# Altium PCB Alles.PcbDoc (part 1 of 2)
Units mm, origin at the board's own origin, x right, y up, seen from the top; angles counter-clockwise.
Board outline 50 x 25 mm, 4 copper layers (Top Layer, Layer 1, Layer 2, Bottom Layer), stack 1.171 mm thick; 72 components, 42 nets, 250 pads, 140 vias.
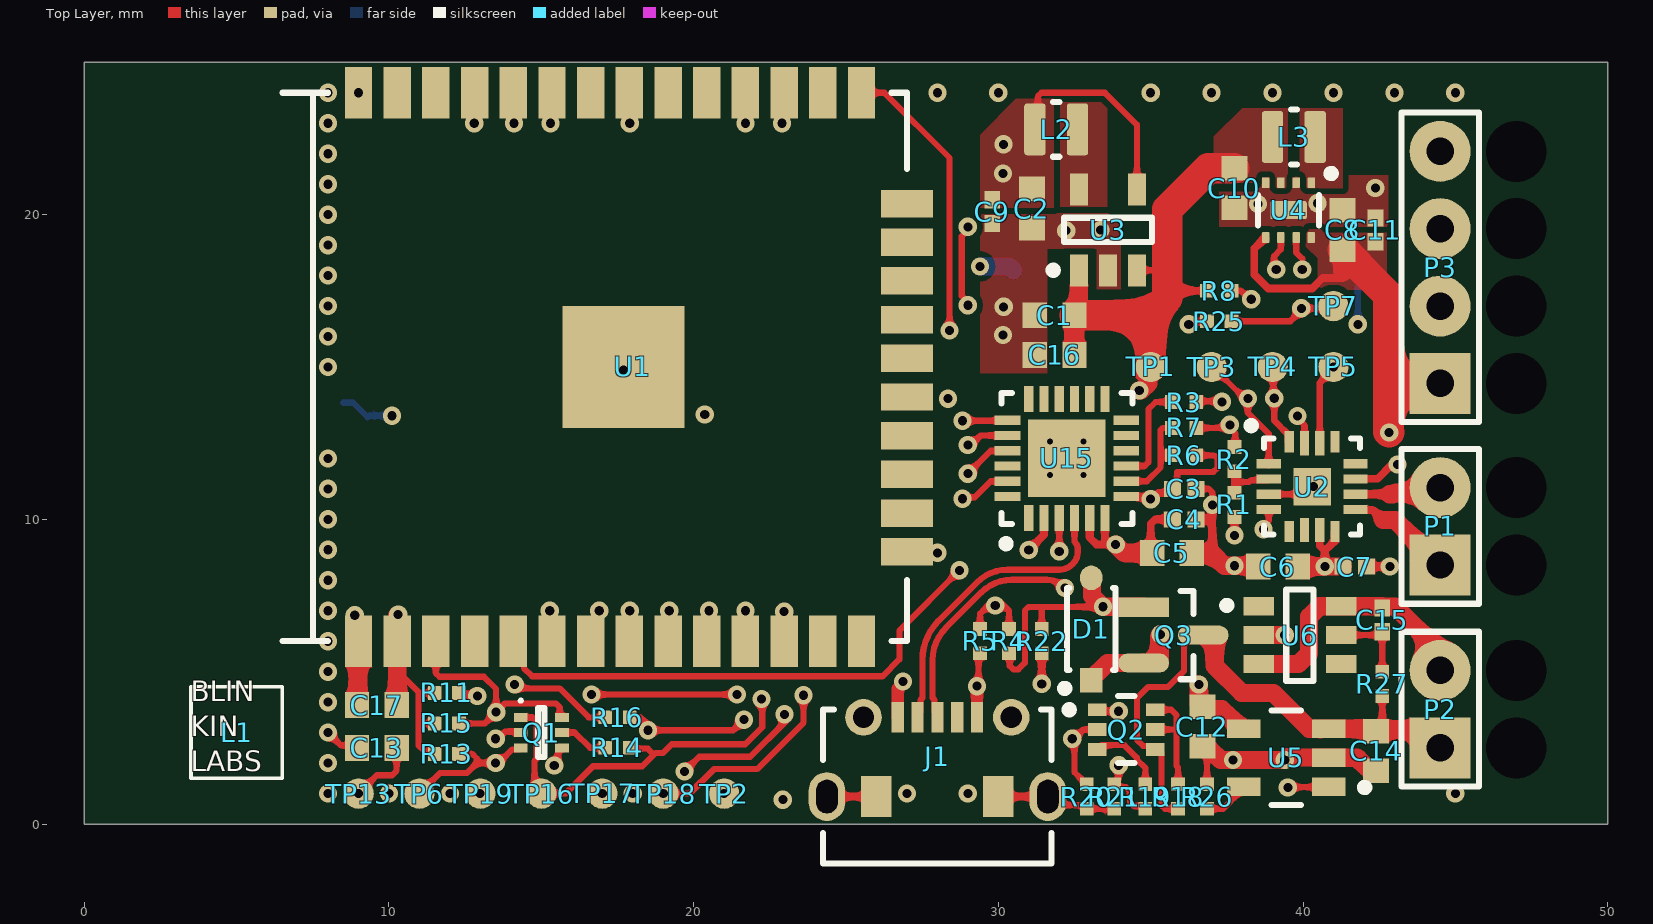
[diagram p0: Top Layer view]
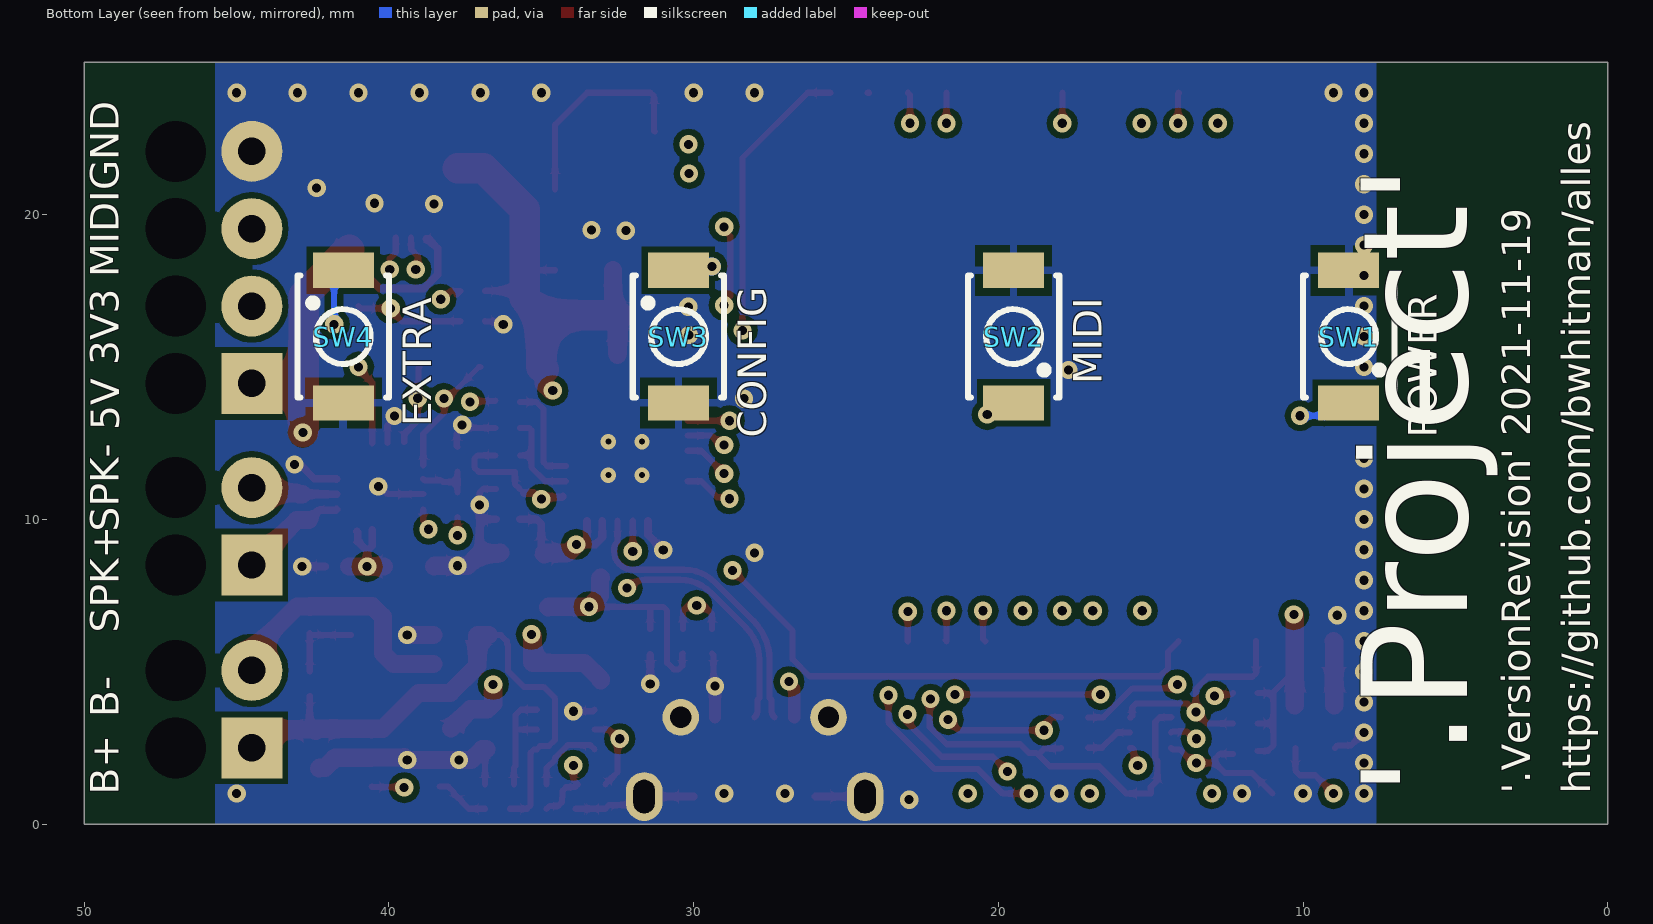
[diagram p1: Bottom Layer view, seen from below]
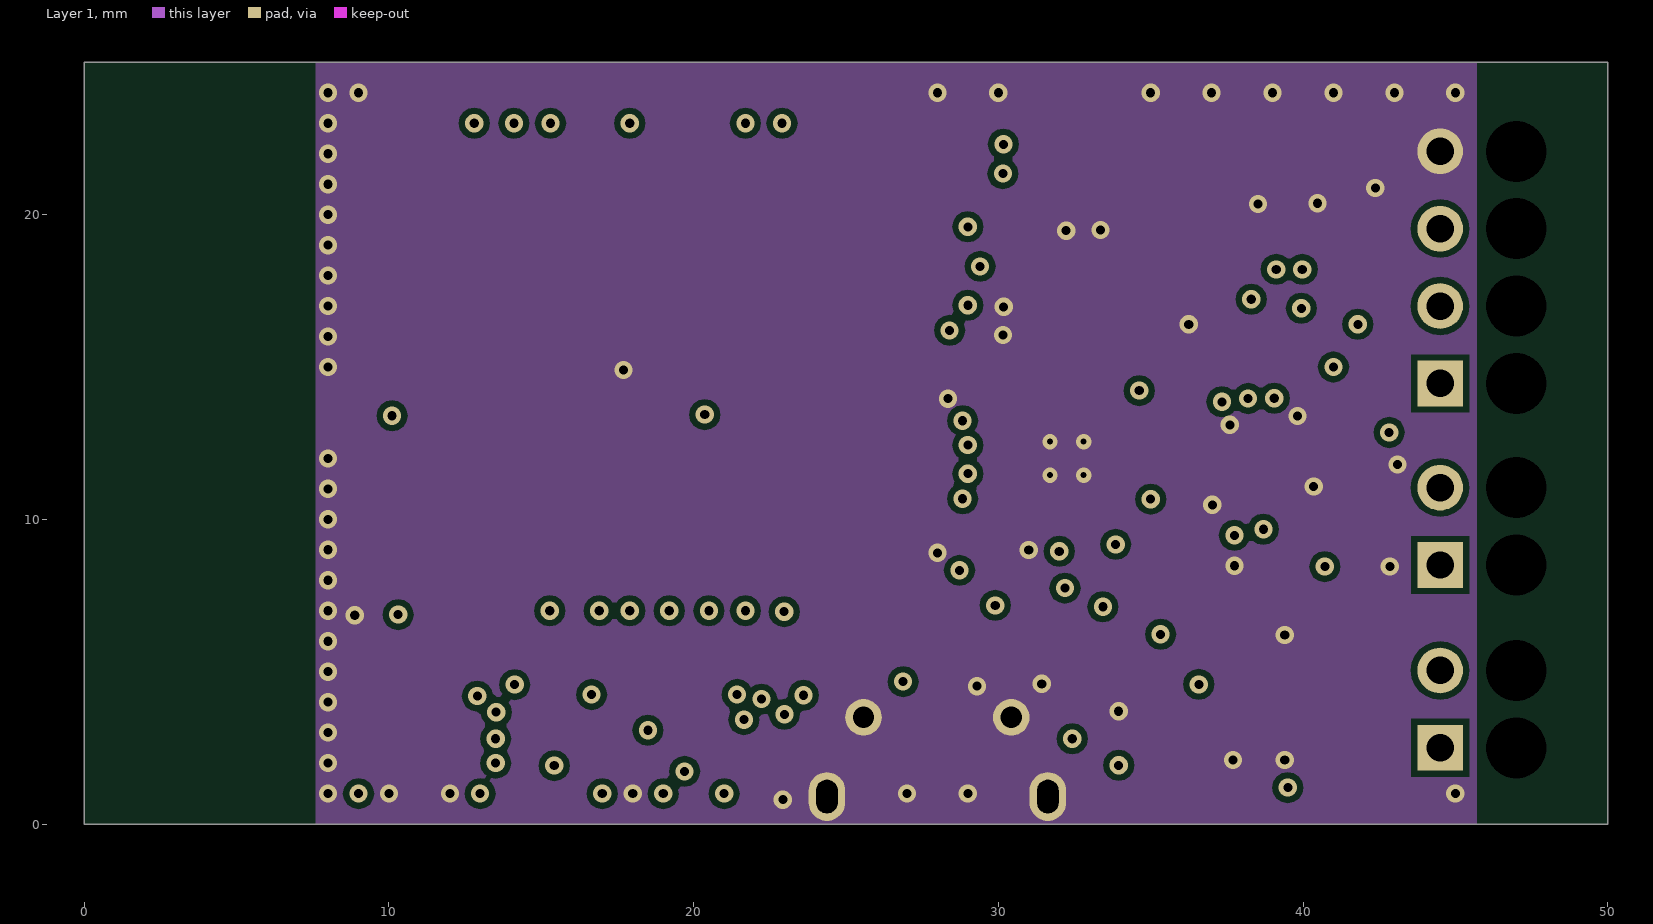
[diagram p2: Layer 1]
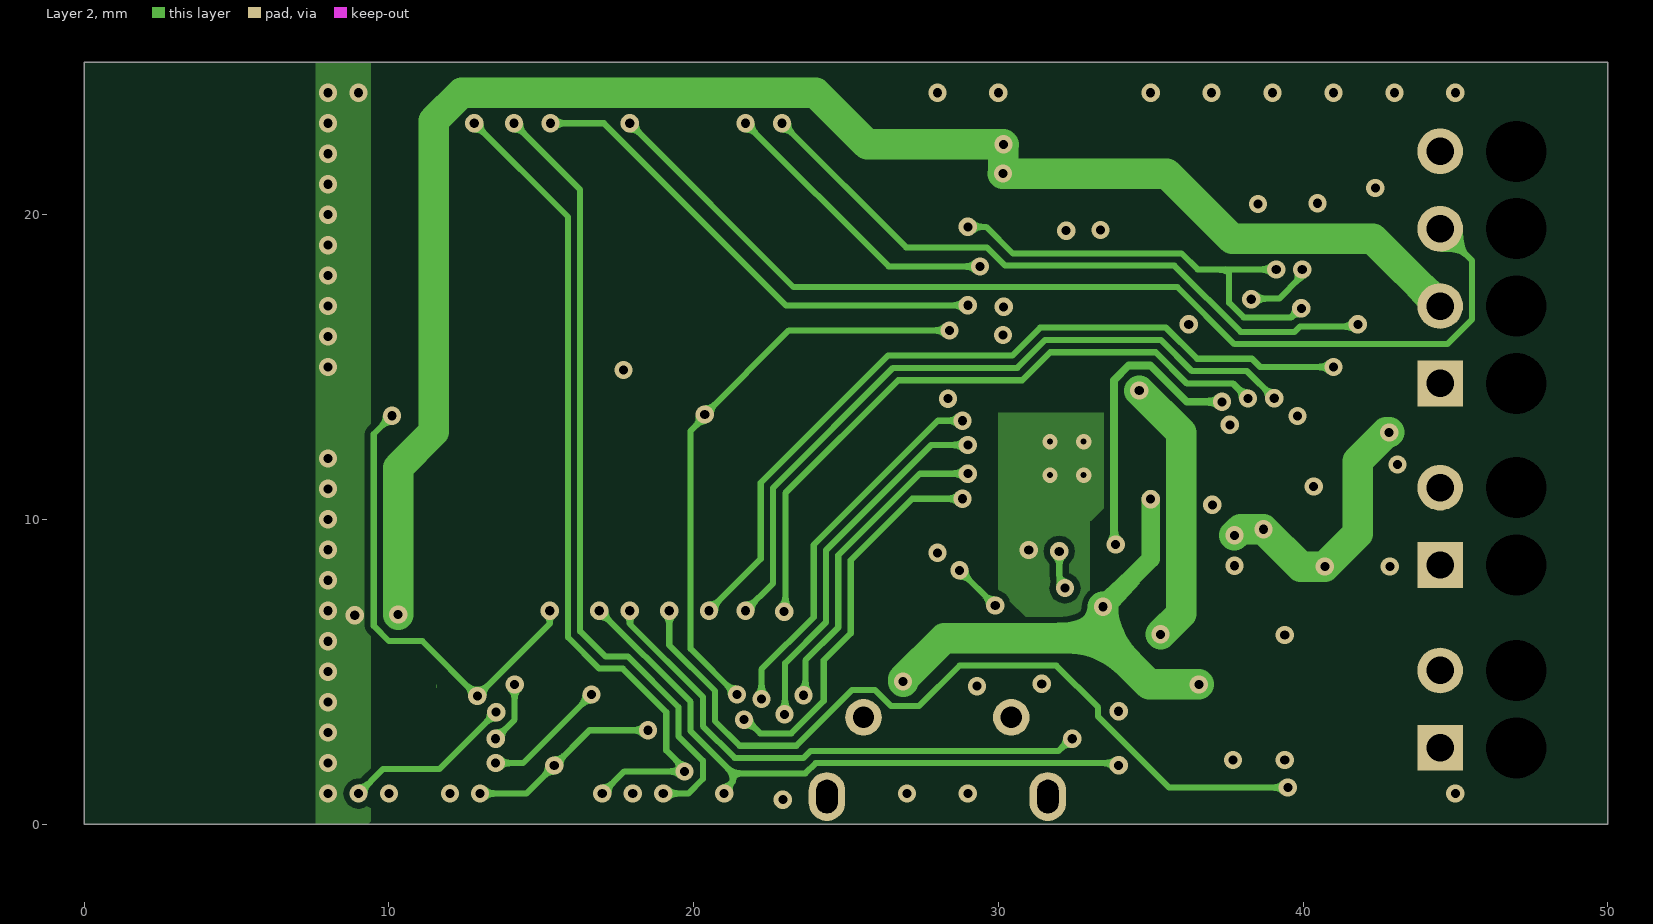
[diagram p3: Layer 2]

## Layer stack, top to bottom
Top Solder: solder mask 0.013, SM-001, Dk 4
Top Layer: signal copper 0.035
Dielectric 2: prepreg 0.2, PP-022, Dk 4.6
Layer 1: signal copper 0.018
Dielectric 3: core 0.665, Core-039, Dk 4.8
Layer 2: signal copper 0.018
Dielectric 4: prepreg 0.2, PP-022, Dk 4.6
Bottom Layer: signal copper 0.035
Bottom Solder: solder mask 0.013, SM-001, Dk 4

## Board outline
0,0 0,25 50,25 50,0

## Design rules (kind name [scope] priority, off if disabled: settings)
Clearance Clearance_diff [InAnyDifferentialPair vs InAnyDifferentialPair] p1: gap=0.127 ignorepadtopadclearanceinfootprint=FALSE
Clearance [All] p2: gap=0.2 ignorepadtopadclearanceinfootprint=TRUE
DiffPairsRouting DiffPairsRouting_90 [InDifferentialPair('USB D')] p1: maxlimit=0.127 minlimit=0.127 mostfreqgap=0.127 toplayer_minwidth=0.205 toplayer_maxwidth=0.205 toplayer_prefwidth=0.205 midlayer1_minwidth=0.133 midlayer1_maxwidth=0.133 midlayer1_prefwidth=0.133 midlayer2_minwidth=0.133 midlayer2_maxwidth=0.133 midlayer2_prefwidth=0.133 bottomlayer_minwidth=0.205 bottomlayer_maxwidth=0.205 bottomlayer_prefwidth=0.205 impedanceprofiledriven=TRUE impedanceprofileid={E291AA02-141E-47CC-AA00-C6A5C8C20C5F} impedanceprofilevalue=90.000000 maxuncoupledlength=12.7
DiffPairsRouting [All] p2: maxlimit=0.254 minlimit=0.254 mostfreqgap=0.254 toplayer_minwidth=0.381 toplayer_maxwidth=0.381 toplayer_prefwidth=0.381 midlayer1_minwidth=0.381 midlayer1_maxwidth=0.381 midlayer1_prefwidth=0.381 midlayer2_minwidth=0.381 midlayer2_maxwidth=0.381 midlayer2_prefwidth=0.381 bottomlayer_minwidth=0.381 bottomlayer_maxwidth=0.381 bottomlayer_prefwidth=0.381 maxuncoupledlength=12.7
PolygonConnect PolygonConnect_power [InNetClass('POWER') and not OnBottomLayer] p1: connectstyle=Direct reliefconductorwidth=0.254 reliefentries=4 polygonreliefangle="90 Angle" airgapwidth=0.254
PolygonConnect [All] p2: connectstyle=Relief reliefconductorwidth=0.254 reliefentries=4 polygonreliefangle="90 Angle" airgapwidth=0.254
RoutingVias [All] p1: holewidth=0.711 width=1.27 viastyle="Through Hole" minholewidth=0.3 minwidth=0.6 maxholewidth=0.711 maxwidth=1.27
SolderMaskExpansion SolderMaskExpansion_via [isvia] p1: expansion=-99 istentingtop=FALSE
SolderMaskExpansion [All] p2: expansion=0.102 istentingtop=FALSE
Width Width_power [InNetClass('POWER')] p1: maxlimit=1 minlimit=0.2 preferedwidth=0.6
Width [All] p2: maxlimit=0.6 minlimit=0.2 preferedwidth=0.254
29 further rules are at their usual default settings.

## Classes and differential pairs
net class USB: "USB D_N" "USB D_P"
net class SERIAL: D\T\R\ R\T\S\ UART0_RXD UART0_TXD
net class POWER: 3.3V 5V 5V_USB GND NetC15_1 NetL2_1 NetL3_2 V_BAT V_SWITCH
component class Alles_base_project: L1
component class "[06] Power Supply": C1 C2 C8 C9 C10 C11 C12 C14 C15 C16 D1 L2 L3 P2 Q2 Q3 R4 R5 R8 R9 R10 R17 R18 R19 R20 R21 R22 R25 R26 R27 TP1 TP2 TP7 TP8 TP12 U3 U4 U5 U6
component class "[05] Amplifier": C6 C7 P1 R1 R2 R17 U2
component class "[04] Serial Console": C3 C4 C5 J1 R3 R6 R7 R12 U15
component class "[03] ESP32": C13 C17 P3 Q1 R11 R12 R13 R14 R15 R16 R17 SW1 SW2 SW3 SW4 TP3 TP4 TP5 TP6 TP8 TP9 TP10 TP11 TP12 TP13 TP16 TP17 TP18 TP19 U1
differential pair "USB D": +"USB D_P" -"USB D_N"

## Components (designator, comment, footprint, x,y, rotation, side; value= is the part's Value field where it differs from the comment)
C1 "4.7uF" CAPC1608X09L 31.85,16.7 r180 top
C2 "10uF" CAPC1608X09L 31.1,20.2 r270 top
C3 "0.10uF" CAPC1005X06L 36.1,11 r180 top
C4 "0.10uF" CAPC1005X06L 36.1,10 r180 top
C5 "4.7uF" CAPC1608X09L 35.7,8.9 r0 top
C6 "10uF" CAPC1608X09L 39.175,8.45 r180 top
C7 "0.10uF" CAPC1005X06L 41.7,8.45 r180 top
C8 "22uF" CAPC1608X09L 41.3,19.5 r90 top
C9 "0.10uF" CAPC1005X06L 29.8,20.1 r90 top
C10 "4.7uF" CAPC1608X09L 37.75,20.875 r270 top
C11 "0.10uF" CAPC1005X06L 42.375,19.5 r270 top
C12 "4.7uF" CAPC1608X09L 36.7,3.2 r270 top
C13 "4.7uF" CAPC1608X09L 9.6,2.5 r180 top
C14 "4.7uF" CAPC1608X09L 42.4,2.4 r270 top
C15 "0.10uF" CAPC1005X06L 42.6,6.7 r270 top
C16 "22uF" CAPC1608X09L 31.85,15.4 r180 top
C17 "22uF" CAPC1608X09L 9.6,3.9 r180 top
D1 "MBR0520LT1G" FP-425-04-IPC_C 33.05,6.4 r90 top
J1 "A01SB741B1-267" A01SB741B1-267 28,3.5 r180 top locked
L1 "BLINKINLABS_LOGO" BLINKINLABS_LOGO_SMALL 5,3 r0 top
L2 "1uH" FNR201610S 31.9,22.8 r180 top
L3 "1uH" FNR201610S 39.7,22.55 r0 top
P1 "Header 2" HDR1X2 44.5,8.5 r90 top
P2 "Battery" HDR1X2 44.5,2.5 r90 top
P3 "Header 4" HDR1X4 44.5,14.46 r90 top
Q1 "EMX1DXV6T1G" ONSC-SOT-563-6-463A-01_V 15,3 r0 top
Q2 "DMC3400SDW-7" FP-SOT363-MFG 34.2,3.1 r0 top
Q3 "DMP3099L-13" FP-SOT23-IPC_A 35.75,6.2 r0 top
R1 "100k" ERJ2G(0402)_L 37.75,10.475 r270 top
R2 "0.0" ERJ2G(0402)_L 37.75,11.975 r270 top
R3 "10k" ERJ2G(0402)_L 36.1,13.85 r0 top
R4 "100k" ERJ2G(0402)_L 30.35,6 r270 top
R5 "10k" ERJ2G(0402)_L 29.4,6 r270 top
R6 "22.1k" ERJ2G(0402)_L 36.1,12.1 r0 top
R7 "47.5k" ERJ2G(0402)_L 36.1,13 r180 top
R8 "1M" ERJ2G(0402)_L 37.25,17.5 r180 top
R11 "10k" ERJ2G(0402)_L 11.9,4.3 r0 top
R13 "10k" ERJ2G(0402)_L 11.9,2.3 r0 top
R14 "100k" ERJ2G(0402)_L 17.5,2.5 r180 top
R15 "10k" ERJ2G(0402)_L 11.9,3.3 r0 top
R16 "100k" ERJ2G(0402)_L 17.5,3.5 r180 top
R18 "100k" ERJ2G(0402)_L 35.9,0.9 r270 top
R19 "100k" ERJ2G(0402)_L 34.825,0.9 r90 top
R20 "100k" ERJ2G(0402)_L 32.9,0.9 r90 top
R21 "10k" ERJ2G(0402)_L 33.8,0.9 r270 top
R22 "10k" ERJ2G(0402)_L 31.425,6 r270 top
R25 "100k" ERJ2G(0402)_L 37.25,16.5 r0 top
R26 "2k" ERJ2G(0402)_L 36.85,0.9 r270 top
R27 "100" ERJ2G(0402)_L 42.6,4.6 r270 top
SW1 "TS-1185" TS-1185 8.5,16 r90 bottom locked
SW2 "TS-1185" TS-1185 19.5,16 r90 bottom locked
SW3 "TS-1185" TS-1185 30.5,16 r270 bottom locked
SW4 "TS-1185" TS-1185 41.5,16 r270 bottom locked
TP1 "TEST_POINT" TP-SMD-1mm 35,15 r90 top
TP2 "TEST_POINT" TP-SMD-1mm 21,1 r90 top
TP3 "TEST_POINT" TP-SMD-1mm 37,15 r90 top
TP4 "TEST_POINT" TP-SMD-1mm 39,15 r90 top
TP5 "TEST_POINT" TP-SMD-1mm 41,15 r90 top
TP6 "TEST_POINT" TP-SMD-1mm 11,1 r90 top
TP7 "TEST_POINT" TP-SMD-1mm 41,17 r90 top
TP13 "TEST_POINT" TP-SMD-1mm 9,1 r90 top
TP16 "TEST_POINT" TP-SMD-1mm 15,1 r90 top
TP17 "TEST_POINT" TP-SMD-1mm 17,1 r90 top
TP18 "TEST_POINT" TP-SMD-1mm 19,1 r90 top
TP19 "TEST_POINT" TP-SMD-1mm 13,1 r90 top
U1 "ESP32-WROOM-32E(4MB)" ESP32-WROOM-32-shortpad 9,6 r90 top locked
U2 "MAX98357AETE+" FP-T1633-4-MFG 40.3,11.075 r0 top
U3 "ADP2108AUJZ-3.3-R7" SOT95P280X100-5N 33.6,19.5 r90 top
U4 "MIC2875-5.0YMT-T5" "TDFN22-8LD-PL-1 (hand drawn)" 39.525,20.15 r270 top
U5 "MCP73832T-2ACI/OT" FP-C04-091-OT-MFG 39.45,2.175 r180 top
U6 "XB5307H" SOT95P280X125-6N-3 39.9,6.2 r0 top
U15 "CP2102N-A01-GQFN24" SLAB-QFN-24-2550x2550TP_A_V 32.25,12 r90 top

## Footprints (in the part's own frame and the unit in brackets; to place one, negate y for a bottom-side part, rotate by r counter-clockwise, add the part's x,y. Pads: shape width x height; smd on the part's side, far side on the other; paste and mask are expansions set on the pad)
A01SB741B1-267 [mm] "micro usb B type"
  rect 0.4x1 smd: D+(0,0) D-(0.65,0) GND(-1.3,0) ID(-0.65,0) VBUS(1.3,0)
  rrect100% 1.2x1.6 hole 0.7 slot 1.1 at 90 deg: S1(-3.625,2.6) S2(3.625,2.6)
  round 1.2 hole 0.7: S3(-2.425,0) S4(2.425,0)
  rect 1x1.35 smd: S5(-2,2.6) S6(2,2.6)
  silkscreen extent -3.75,-0.26 3.75,4.8, body extent -3.75,-0.3 3.75,4.78, height 2.44
BLINKINLABS_LOGO_SMALL [mm] "Small blinkinlabs logo"
  silkscreen extent -1.5,-1.5 1.5,1.5
CAPC1005X06L [mm] "Chip Capacitor, 2-Leads, Body 1.00x0.50mm, IPC High Density"
  rect 0.56x0.52 smd: 1(-0.39,0) 2(0.39,0)
  body extent -0.53,-0.28 0.53,0.28, height 0.55
CAPC1608X09L [mm] "Chip Capacitor, 2-Leads, Body 1.60x0.80mm, IPC High Density"
  rect 0.8x0.85 smd: 1(-0.65,0) 2(0.65,0)
  body extent -0.85,-0.45 0.85,0.45, height 0.9
ERJ2G(0402)_L [mm] "Chip Resistor, 2-Leads, Body 1.00x0.50mm, IPC High Density"
  rect 0.45x0.45 smd: 1(-0.4,0) 2(0.4,0)
  body extent -0.53,-0.27 0.53,0.28, height 0.4
ESP32-WROOM-32-shortpad [mm] "ESP32 module, with shorter solder pads"
  rect 1.7x0.9 smd paste-99: 1(0,0) 2(0,-1.27) 3(0,-2.54) 4(0,-3.81) 5(0,-5.08) 6(0,-6.35) 7(0,-7.62) 8(0,-8.89) 9(0,-10.16) 10(0,-11.43) 11(0,-12.7) 12(0,-13.97) 13(0,-15.24) 14(0,-16.51) 25(18,-16.51) 26(18,-15.24) 27(18,-13.97) 28(18,-12.7) 29(18,-11.43) 30(18,-10.16) 31(18,-8.89) 32(18,-7.62) 33(18,-6.35) 34(18,-5.08) 35(18,-3.81) 36(18,-2.54) 37(18,-1.27) 38(18,0)
  rect 0.9x1.7 smd paste-99: 15(2.935,-18) 16(4.205,-18) 17(5.475,-18) 18(6.745,-18) 19(8.015,-18) 20(9.285,-18) 21(10.555,-18) 22(11.825,-18) 23(13.095,-18) 24(14.365,-18)
  rect 4x4 smd paste-99: 39(9,-8.7)
  silkscreen extent 0,-18 18,2.5, body extent 0,-18 18,7.5, height 2.8
FNR201610S [mm] "Wire Wound SMD Power Inductors 2.0×1.6×1.0"
  rrect25% 0.7x1.7 smd paste+0: 1(-0.7,0) 2(0.7,0)
  silkscreen extent -0.1,-0.9 0.1,0.9, body extent -1,-0.8 1,0.8, height 0.95
FP-425-04-IPC_C [mm]
  rect 0.808x0.742 smd paste+0 mask+0: 1(-1.68,0)
  rrect100% 0.808x0.742 smd paste+0 mask+0: 2(1.68,0)
  silkscreen extent -2.07,-0.8 1.35,1, body extent -2.18,-0.9 2.18,0.9, height 0.25
FP-C04-091-OT-MFG [mm]
  rect 1.1x0.6 smd paste+0 mask+0: 1(-1.4,0.95) 2(-1.4,0) 3(-1.4,-0.95) 4(1.4,-0.95) 5(1.4,0.95)
  silkscreen extent -2.7,-1.55 0.48,1.55, body extent -2.05,-1.9 2.05,1.9, height 0.25
FP-SOT23-IPC_A [mm]
  rect 1.659x0.627 smd paste+0 mask+0: 1(-0.977,0.915)
  rrect100% 1.659x0.627 smd paste+0 mask+0: 2(-0.977,-0.915) 3(0.977,0)
  silkscreen extent 0.23,-1.45 0.65,1.45, body extent -2.31,-1.95 2.31,1.95, height 0.25
FP-SOT363-MFG [mm]
  rect 0.6x0.42 smd paste+0 mask+0: 1(-0.95,0.65) 2(-0.95,0) 3(-0.95,-0.65) 4(0.95,-0.65) 5(0.95,0) 6(0.95,0.65)
  silkscreen extent -2,-1.1 0.28,1.1, body extent -1.35,-1.2 1.35,1.2, height 0.25
FP-T1633-4-MFG [mm]
  rect 0.8x0.3 smd paste+0 mask+0: 1(-1.425,0.75) 2(-1.425,0.25) 3(-1.425,-0.25) 4(-1.425,-0.75) 9(1.425,-0.75) 10(1.425,-0.25) 11(1.425,0.25) 12(1.425,0.75)
  rect 0.3x0.7 smd paste+0 mask+0: 5(-0.75,-1.475) 8(0.75,-1.475) 13(0.75,1.475) 16(-0.75,1.475)
  rect 0.3x0.8 smd paste+0 mask+0: 6(-0.25,-1.425) 7(0.25,-1.425) 14(0.25,1.425) 15(-0.25,1.425)
  rect 1.23x1.23 smd paste+0 mask+0: 17(0,0)
  silkscreen extent -2.12,-1.58 1.58,2.12, body extent -1.92,-1.92 1.92,1.92, height 0.25
HDR1X2 [mm] "Connector; Header; 2 Position"
  rect 2x2 / inner rect 1.5x1.5 / far side rect 2x2 hole 0.9: 1(0,0)
  round 2 / inner round 1.5 / far side round 2 hole 0.9: 2(2.54,0)
  silkscreen extent -1.27,-1.27 3.81,1.27
HDR1X4 [mm] "Connector; Header; 4 Position"
  rect 2x2 / inner rect 1.5x1.5 / far side rect 2x2 hole 0.9: 1(0,0)
  round 2 / inner round 1.5 / far side round 2 hole 0.9: 2(2.54,0) 3(5.08,0) 4(7.62,0)
  silkscreen extent -1.27,-1.27 8.89,1.27
ONSC-SOT-563-6-463A-01_V [mm] "SOT23, 6-Leads, Body 1.6x1.2mm, Pitch 0.5mm"
  rect 0.45x0.3 smd: 1(-0.675,0.5) 2(-0.675,0) 3(-0.675,-0.5) 4(0.675,-0.5) 5(0.675,0) 6(0.675,0.5)
  silkscreen extent -0.72,-0.8 0.1,1.1, body extent -0.6,-0.8 0.6,0.8, height 0.6
SLAB-QFN-24-2550x2550TP_A_V [mm] "QFN, 6-Leads, Body 4x4mm, Pitch 0.5mm, Thermal Pad 2.55x2.55mm"
  rect 0.85x0.3 smd: 1(-1.95,1.25) 2(-1.95,0.75) 3(-1.95,0.25) 4(-1.95,-0.25) 5(-1.95,-0.75) 6(-1.95,-1.25) 13(1.95,-1.25) 14(1.95,-0.75) 15(1.95,-0.25) 16(1.95,0.25) 17(1.95,0.75) 18(1.95,1.25)
  rect 0.3x0.85 smd: 7(-1.25,-1.95) 8(-0.75,-1.95) 9(-0.25,-1.95) 10(0.25,-1.95) 11(0.75,-1.95) 12(1.25,-1.95) 19(1.25,1.95) 20(0.75,1.95) 21(0.25,1.95) 22(-0.25,1.95) 23(-0.75,1.95) 24(-1.25,1.95)
  rect 2.55x2.55 smd: 25(0,0)
  silkscreen extent -2.92,-2.15 2.15,2.15, body extent -2,-2 2,2, height 0.8
SOT95P280X100-5N [mm] "SOT23, 5-Leads, Body 2.90x2.80mm, Pitch 0.95mm, IPC Medium Density"
  rect 1.05x0.6 smd: 1(-1.325,0.95) 2(-1.325,0) 3(-1.325,-0.95) 4(1.325,-0.95) 5(1.325,0.95)
  silkscreen extent -1.45,-1.45 0.4,1.92, body extent -1.4,-1.45 1.4,1.45, height 1
SOT95P280X125-6N-3 [mm] "SOT23, 6-Leads, Body 2.92x2.80mm, Pitch 0.95mm, IPC Medium Density"
  rect 1x0.6 smd: 1(-1.35,0.95) 2(-1.35,0) 3(-1.35,-0.95) 4(1.35,-0.95) 5(1.35,0) 6(1.35,0.95)
  silkscreen extent -2.52,-1.5 0.45,1.5, body extent -1.48,-1.51 1.48,1.51, height 1.25
"TDFN22-8LD-PL-1 (hand drawn)" [mm]
  rrect25% 0.35x0.25 smd: 1(-0.9,0.75) 2(-0.9,0.25) 3(-0.9,-0.25) 4(-0.9,-0.75) 5(0.9,-0.75) 6(0.9,-0.25) 7(0.9,0.25) 8(0.9,0.75)
  rrect25% 0.6x1.2 smd: 9(0,0)
  silkscreen extent -1.32,-1 0.5,1.53, body extent -1,-1 1,1, height 0.55
TP-SMD-1mm [mm] "Test point, round, 1mm, SMD"
  round 1 smd paste-999: 1(0,0)
TS-1185 [mm] "3x4x2mm Tact Switch, no alignment pin"
  rect 1.15x2 smd: 1(-2.175,0) 2(2.175,0)
  silkscreen extent -2,-1.5 2,1.5, body extent -2,-1.5 2,1.5, height 2

## Part data
C1 C10 C12 C14: library part GRM188R61A475KE15D, "CAP CER 4.7UF 10V X5R 0603", Case/Package=0603, Digi-Key Part Number=490-10477-1-ND, Manufacturer="Murata Electronics North America", Operating Temperature="-55°C ~ 85°C", Package / Case="0603 (1608 Metric)", Temperature Coefficient=X5R, Tolerance=±10%, Voltage=10V, Applications="General Purpose", Datasheets=http://www.murata.com/~/media/webrenewal/support/library/catalog/products/capacitor/mlcc/c02e.pdf, Features="Derating Recommended", Image=//media.digikey.com/Renders/Murata%20Renders/ZRB-SERIES-0402.jpg, PartNumber=GRM188R61A475KE15D, Series=GRM
C2 C6: library part GRM188R61A106KE69D, "CAP CER 10UF 10V X5R 0603", Case/Package=0603, Digi-Key Part Number=490-10474-1-ND, Manufacturer="Murata Electronics North America", Operating Temperature="-55°C ~ 85°C", Package / Case="0603 (1608 Metric)", Temperature Coefficient=X5R, Tolerance=±10%, Voltage=10V, Applications="General Purpose", Datasheets=http://www.murata.com/~/media/webrenewal/support/library/catalog/products/capacitor/mlcc/c02e.pdf, Features="Derating Recommended", Image=//media.digikey.com/Renders/Murata%20Renders/ZRB-SERIES-0402.jpg, PartNumber=GRM188R61A106KE69D, Series=GRM
C3 C4 C7: library part GRM152R61A104ME19D, "CAP CER 0.1UF 10V X5R 0402", Case/Package=0402, Digi-Key Part Number=490-10009-1-ND, Manufacturer="Murata Electronics North America", Operating Temperature="-55°C ~ 85°C", Package / Case="0402 (1005 Metric)", Temperature Coefficient=X5R, Tolerance=±20%, Voltage=10V, Applications="General Purpose", Datasheets=http://www.murata.com/~/media/webrenewal/support/library/catalog/products/capacitor/mlcc/c02e.pdf, Features="Derating Recommended", Image=//media.digikey.com/Renders/Murata%20Renders/ZRB-SERIES-0402.jpg, Packaging="Cut Tape (CT)", PartNumber=GRM152R61A104ME19D, Series=GRM
C5 C13: library part GRM185R61A475KE11D, "CAP CER 4.7UF 10V X5R 0603", Case/Package=0603, Digi-Key Part Number=490-11988-1-ND, Manufacturer="Murata Electronics North America", Operating Temperature="-55°C ~ 85°C", Package / Case="0603 (1608 Metric)", Temperature Coefficient=X5R, Tolerance=±10%, Voltage=10V, Applications="General Purpose", Datasheets=http://www.murata.com/~/media/webrenewal/support/library/catalog/products/capacitor/mlcc/c02e.pdf, Features=-, Image=//media.digikey.com/Renders/Murata%20Renders/ZRB-SERIES-0402.jpg, PartNumber=GRM185R61A475KE11D, Series=GRM
C8 C16 C17: library part GRM187R61A226ME15D, "CAP CER 22UF 10V X5R 0603", Case/Package=0603, Digi-Key Part Number=490-13243-1-ND, Manufacturer="Murata Electronics North America", Operating Temperature="-55°C ~ 85°C", Package / Case="0603 (1608 Metric)", Temperature Coefficient=X5R, Tolerance=±20%, Voltage=10V, Applications="General Purpose", Datasheets=http://psearch.en.murata.com/capacitor/product/GRM187R61A226ME15%23.pdf, Features="Derating Recommended", Image=//media.digikey.com/Renders/Murata%20Renders/ZRB-SERIES-0402.jpg, PartNumber=GRM187R61A226ME15D, Series=GRM
C9 C11 C15: library part GRM155R61C104KA88J, "CAP CER 0.1UF 16V X5R 0402", Case/Package=0402, Digi-Key Part Number=490-6310-1-ND, Manufacturer="Murata Electronics North America", Operating Temperature="-55°C ~ 85°C", Package / Case="0402 (1005 Metric)", Temperature Coefficient=X5R, Tolerance=±10%, Voltage=16V, Applications="General Purpose", Datasheets=http://www.murata.com/~/media/webrenewal/support/library/catalog/products/capacitor/mlcc/c02e.pdf, Features=-, Image=//media.digikey.com/Renders/Murata%20Renders/ZRB-SERIES-0402.jpg, Packaging="Cut Tape (CT)", PartNumber=GRM155R61C104KA88J, Series=GRM
D1: library part CMP-1055-00425-2, "DIODE SCHOTTKY 20V 500MA SOD123", Average Rectified Current=500mA, Case/Package=SOD-123-2, Forward Voltage=385mV, Max Forward Surge Current (Ifsm)=5.5A, Max Operating Temperature=125°C, Max Repetitive Reverse Voltage (Vrrm)=20V, Max Reverse Leakage Current=250uA, Min Operating Temperature=-65°C, Package Quantity=3000, Contact Plating=Tin, Current Rating=500mA, Element Configuration=Single, Forward Current=500mA, Height=1.12mm, Lead Free="Lead Free", Length=2.69mm, Max Reverse Voltage (DC)=20V, Max Surge Current=5.5A, Number of Pins=2, Output Current=500mA, Packaging="Tape and Reel", Peak Non-Repetitive Surge Current=5.5A, Peak Reverse Current=250uA, Polarity=Standard, Radiation Hardening=No, REACH SVHC="No SVHC", Termination=SMD/SMT, Voltage Rating (DC)=20V, Width=1.6mm
J1: "Micro USB B type 四脚全插牛角", Manufacturer=Unknown/Generic, PartNumber=Unknown/Generic
L1: "Square logo"
L2 L3: library part FNR201610S1R0MT, "1uH ±20% 1.45A 114mΩ SMD,2.0x1.6x1.0mm Power Inductors RoHS", Case/Package=SMD,2.0x1.6x1.0mm, DC Resistance=114mΩ, LCSC PartNumber=C167670, Manufacturer="Changjiang Microelectronics Tech", Saturation current=1.45A, Tolerance=±20%, Datasheets=https://datasheet.lcsc.com/szlcsc/1805291223_cjiang-Changjiang-Microelectronics-Tech-FNR201610S1R0MT_C167670.pdf, Inductance=1uH, Package / Case=SMD,2.0x1.6x1.0mm, Packaging="Cut Tape (CT)", PartNumber=FNR201610S1R0MT
P1: "Header, 2-Pin", LatestRevisionDate=17-Jul-2002, LatestRevisionNote="Re-released for DXP Platform.", Publisher="Altium Limited"
P2: library part "Header 2", "Header, 2-Pin", LatestRevisionDate=17-Jul-2002, LatestRevisionNote="Re-released for DXP Platform.", Publisher="Altium Limited"
P3: "Header, 4-Pin", LatestRevisionDate=17-Jul-2002, LatestRevisionNote="Re-released for DXP Platform.", Publisher="Altium Limited"
Q1: library part CMP-1048-00890-1, "Dual NPN General Purpose Amplifier Transistors, 6-Pin SOT-563, Pb-Free, Tape and Reel", Manufacturer="On Semiconductor", ComponentLink1Description="Manufacturer URL", ComponentLink1URL=http://www.onsemi.com/, ComponentLink2Description=Datasheet, ComponentLink2URL=http://www.onsemi.com/pub_link/Collateral/EMX1DXV6T1-D.PDF, ComponentLink3Description="Package Specification", ComponentLink3URL=http://www.onsemi.cn/pub_link/Collateral/463A-01.PDF, DatasheetVersion="Rev. 1", IC Continuous (A)=0.1, Mounting Technology="Surface Mount", PackageDescription="6-Pin Small Outline Transistor, Body 1.6 x 1.2 mm, Pitch 0.5 mm", PackageReference=SOT-563-6-463A-01, PackageVersion="Rev. F, 04/2005", Packing="Tape and Reel", PartNumber=EMX1DXV6T1G, Polarity="Dual NPN", RoHS=TRUE
Q2: library part CMP-12801-000006-1, "MOSFET N/P-CH 30V SOT363", Continuous Drain Current=0.65/-0.45A, Drain To Source Breakdown Voltage=30/-30V, Drain To Source Resistance=0.2/0.36Ω, Gate To Source Voltage=20V, Manufacturer="Diodes Inc.", Max Forward Diode Voltage=1.2/-1.2V, Max Junction Temp=+150°C, Package=SOT363, Power Dissipation=0.31W, Pulse Drain Current=4/-3A, Temperature="-55°C to +150°C", Temperature Range Low=-55°C, Typ Forward Diode Voltage=0.8/-0.8V, Automotive=No, Category=Trans, ComponentLink2Description=Datasheet, ComponentLink2URL=https://www.diodes.com/assets/Datasheets/DMC3400SDW.pdf, Depletion Mode=False, Device Class L1="Discrete Semiconductors", Device Class L2=Transistors, Device Class L3=MOSFETs, Digikey Description="MOSFET N/P-CH 30V SOT363", Drain To Source Voltage=30/-30V, Footprint Url=https://www.diodes.com/assets/Package-Files/SOT363.pdf, Height=1.1mm, Ipc Land Pattern Name=SOT65P210X100-6, Lead Free=Yes, Manufacturer Part Number=DMC3400SDW-7, Mouser Description="MOSFET 30V Comp Pair Enh 20Vgs 55pF 0.6nC", Number of Channels=2, Number Of N Channels=1, Number Of P Channels=1, Octopart=https://octopart.com/dmc3400sdw-7-diodes+inc.-57605013, RoHS=TRUE, Rthja Max=406°C/W, Standoff Height=0mm, Temperature Range High=+150°C, Threshold Vgs Max=1.6/-2.6V, Threshold Vgs Min=0.8/-1V, Turn Off Delay Time=25.2/35ns, Turn On Delay Time=3.8/5.7ns
Q3: library part CMP-12801-000102-1, "MOSFET P-CH 30V 3.8A SOT23", Case/Package=TO-236-3, Continuous Drain Current (ID)=3.8A, Drain To Source Resistance=65mR, Drain to Source Voltage (Vdss)=30V, Gate to Source Voltage (Vgs)=20V, Input Capacitance=563pF, Max Operating Temperature=150°C, Max Power Dissipation=1.08W, Min Operating Temperature=-55°C, Package Quantity=10000, Element Configuration=Single, Fall Time=15ns, Lead Free="Lead Free", Mount="Surface Mount", Number of Channels=1, Number of Pins=3, Packaging="Tape and Reel", Radiation Hardening=No, Rds On Max=65mR, REACH SVHC="No SVHC", Rise Time=5ns, Turn-Off Delay Time=31ns, Turn-On Delay Time=4.8ns, Weight=0.000282oz
R1 R4 R14 R16 R18 R19 R20 R25: library part ERJ-2GEJ104X, "RES SMD 100K OHM 5% 1/10W 0402", Case/Package=0402, Digi-Key Part Number=P100KJCT-ND, Manufacturer="Panasonic Electronic Components", Operating Temperature="-55°C ~ 155°C", Package / Case="0402 (1005 Metric)", Power (Watts)="0.1W, 1/10W", Temperature Coefficient=±200ppm/°C, Tolerance=±5%, Composition="Thick Film", Datasheets=http://industrial.panasonic.com/www-cgi/jvcr13pz.cgi?E+PZ+3+AOA0001+ERJ2GEJ104X+7+WW, Features="Automotive AEC-Q200", Height - Seated (Max)="0.016\" (0.40mm)", Image=//media.digikey.com/Photos/Panasonic%20Photos/ERJ-PA2-Series.jpg, Number of Terminations=2, PartNumber=ERJ-2GEJ104X, Series=ERJ, Size / Dimension="0.039\" L x 0.020\" W (1.00mm x 0.50mm)"
R2: library part ERJ-2GE0R00X, "RES SMD 0.0OHM JUMPER 1/10W 0402", Case/Package=0402, Digi-Key Part Number=P0.0JCT-ND, Manufacturer="Panasonic Electronic Components", Operating Temperature="-55°C ~ 155°C", Package / Case="0402 (1005 Metric)", Power (Watts)="0.1W, 1/10W", Temperature Coefficient=-, Tolerance=Jumper, Composition="Thick Film", Datasheets=http://industrial.panasonic.com/www-cgi/jvcr13pz.cgi?E+PZ+3+AOA0001+ERJ2GE0R00X+7+WW, Features="Automotive AEC-Q200", Height - Seated (Max)="0.016\" (0.40mm)", Image=//media.digikey.com/Photos/Panasonic%20Photos/ERJ-PA2-Series.jpg, Number of Terminations=2, PartNumber=ERJ-2GE0R00X, Series=ERJ, Size / Dimension="0.039\" L x 0.020\" W (1.00mm x 0.50mm)"
R3 R5 R11 R13 R15 R21 R22: library part ERJ-2GEJ103X, "RES SMD 10K OHM 5% 1/10W 0402", Case/Package=0402, Digi-Key Part Number=P10KJCT-ND, Manufacturer="Panasonic Electronic Components", Operating Temperature="-55°C ~ 155°C", Package / Case="0402 (1005 Metric)", Power (Watts)="0.1W, 1/10W", Temperature Coefficient=±200ppm/°C, Tolerance=±5%, Composition="Thick Film", Datasheets=http://industrial.panasonic.com/www-cgi/jvcr13pz.cgi?E+PZ+3+AOA0001+ERJ2GEJ103X+7+WW, Features="Automotive AEC-Q200", Height - Seated (Max)="0.016\" (0.40mm)", Image=//media.digikey.com/Photos/Panasonic%20Photos/ERJ-PA2-Series.jpg, Number of Terminations=2, PartNumber=ERJ-2GEJ103X, Series=ERJ, Size / Dimension="0.039\" L x 0.020\" W (1.00mm x 0.50mm)"
R6: library part ERJ-2RKF2212X, "RES SMD 22.1K OHM 1% 1/10W 0402", Case/Package=0402, Digi-Key Part Number=P22.1KLCT-ND, Manufacturer="Panasonic Electronic Components", Operating Temperature="-55°C ~ 155°C", Package / Case="0402 (1005 Metric)", Power (Watts)="0.1W, 1/10W", Temperature Coefficient=±100ppm/°C, Tolerance=±1%, Composition="Thick Film", Datasheets=http://industrial.panasonic.com/www-cgi/jvcr13pz.cgi?E+PZ+3+AOA0002+ERJ2RKF2212X+7+WW, Features="Automotive AEC-Q200", Height - Seated (Max)="0.016\" (0.40mm)", Image=//media.digikey.com/Photos/Panasonic%20Photos/ERJ-PA2-Series.jpg, Number of Terminations=2, PartNumber=ERJ-2RKF2212X, Series=ERJ, Size / Dimension="0.039\" L x 0.020\" W (1.00mm x 0.50mm)"
R7: library part ERJ-2RKF4752X, "RES SMD 47.5K OHM 1% 1/10W 0402", Case/Package=0402, Digi-Key Part Number=P47.5KLCT-ND, Manufacturer="Panasonic Electronic Components", Operating Temperature="-55°C ~ 155°C", Package / Case="0402 (1005 Metric)", Power (Watts)="0.1W, 1/10W", Temperature Coefficient=±100ppm/°C, Tolerance=±1%, Composition="Thick Film", Datasheets=http://industrial.panasonic.com/www-cgi/jvcr13pz.cgi?E+PZ+3+AOA0002+ERJ2RKF4752X+7+WW, Features="Automotive AEC-Q200", Height - Seated (Max)="0.016\" (0.40mm)", Image=//media.digikey.com/Photos/Panasonic%20Photos/ERJ-PA2-Series.jpg, Number of Terminations=2, PartNumber=ERJ-2RKF4752X, Series=ERJ, Size / Dimension="0.039\" L x 0.020\" W (1.00mm x 0.50mm)"
R8: library part ERJ-2GEJ105X, "RES SMD 1M OHM 5% 1/10W 0402", Case/Package=0402, Digi-Key Part Number=P1.0MJCT-ND, Manufacturer="Panasonic Electronic Components", Operating Temperature="-55°C ~ 155°C", Package / Case="0402 (1005 Metric)", Power (Watts)="0.1W, 1/10W", Temperature Coefficient=±200ppm/°C, Tolerance=±5%, Composition="Thick Film", Datasheets=http://industrial.panasonic.com/www-cgi/jvcr13pz.cgi?E+PZ+3+AOA0001+ERJ2GEJ105X+7+WW, Features="Automotive AEC-Q200", Height - Seated (Max)="0.016\" (0.40mm)", Image=//media.digikey.com/Photos/Panasonic%20Photos/ERJ-PA2-Series.jpg, Number of Terminations=2, PartNumber=ERJ-2GEJ105X, Series=ERJ, Size / Dimension="0.039\" L x 0.020\" W (1.00mm x 0.50mm)"
R26: library part ERJ-2GEJ202X, "RES SMD 2K OHM 5% 1/10W 0402", Case/Package=0402, Digi-Key Part Number=P2.0KJCT-ND, Manufacturer="Panasonic Electronic Components", Operating Temperature="-55°C ~ 155°C", Package / Case="0402 (1005 Metric)", Power (Watts)="0.1W, 1/10W", Temperature Coefficient=±200ppm/°C, Tolerance=±5%, Composition="Thick Film", Datasheets=http://industrial.panasonic.com/www-cgi/jvcr13pz.cgi?E+PZ+3+AOA0001+ERJ2GEJ202X+7+WW, Features="Automotive AEC-Q200", Height - Seated (Max)="0.016\" (0.40mm)", Image=//media.digikey.com/Photos/Panasonic%20Photos/ERJ-PA2-Series.jpg, Number of Terminations=2, PartNumber=ERJ-2GEJ202X, Series=ERJ, Size / Dimension="0.039\" L x 0.020\" W (1.00mm x 0.50mm)"
R27: library part ERJ-2RKF1000X, "RES SMD 100 OHM 1% 1/10W 0402", Case/Package=0402, Digi-Key Part Number=P100LCT-ND, Manufacturer="Panasonic Electronic Components", Operating Temperature="-55°C ~ 155°C", Package / Case="0402 (1005 Metric)", Power (Watts)="0.1W, 1/10W", Temperature Coefficient=±100ppm/°C, Tolerance=±1%, Composition="Thick Film", Datasheets=http://industrial.panasonic.com/www-cgi/jvcr13pz.cgi?E+PZ+3+AOA0002+ERJ2RKF1000X+7+WW, Features="Automotive AEC-Q200", Height - Seated (Max)="0.016\" (0.40mm)", Image=//media.digikey.com/Photos/Panasonic%20Photos/ERJ-PA2-Series.jpg, Number of Terminations=2, PartNumber=ERJ-2RKF1000X, Series=ERJ, Size / Dimension="0.039\" L x 0.020\" W (1.00mm x 0.50mm)"
SW1 SW2 SW3 SW4: "Tact Switch, 3x4mm, no alignment pin, turtle style", Manufacturer=XKB, PartNumber=TS-1185
TP1 TP2 TP3 TP4 TP5 TP6 TP7 TP13 TP16 TP17 TP18 TP19: "Test point"
U1: "32-bit MCU & 2.4 GHz Wi-Fi & Bluetooth/Bluetooth LE", LCSC PartNumber=C701341, Manufacturer="Espressif Systems", PartNumber=ESP32-WROOM-32E(4MB)
U2: library part CMP-05698-000004-1, "IC AMP CLASS D MONO 3.2W 16TQFN", Max Operating Temperature=85°C, Max Output Current=1.6A, Max Output Power=3.2W, Max Power Dissipation=1.666W, Max Supply Voltage=5.5V, Min Operating Temperature=-40°C, Min Supply Voltage=2.5V, Operating Supply Current=2.75mA, Operating Supply Voltage=5V, Package Quantity=490, Power Supply Rejection Ratio (PSRR)=77dB, Voltage Gain=15dB, Contact Plating=Tin, Gain=15dB, Load Impedance=4R, Mount="Surface Mount", Number of Channels=1, Number of Pins=16, Output Power=3.2W, Packaging=Rail/Tube, Radiation Hardening=No, Supply Type=Single
U3: "Compact, 600 mA, 3 MHz, Step-Down DC-to-DC Converter, 3.3V", DigiKey PartNumber=ADP2108AUJZ-3.3-R7CT-ND, LCSC PartNumber=C143875, PartNumber=ADP2108AUJZ-3.3-R7
U4: "4.8A ISW, Synchronous Boost Regulator with Bi-Directional Load Disconnect", DigiKey PartNumber=MIC2875-5.0YMT-T5CT-ND, Manufacturer=Microchip, PartNumber=MIC2875-5.0YMT-T5
U5: library part CMP-0133-00138-2, "IC LI-ION/LI-POLY CTRLR SOT23-5", Case/Package=SOT-23, Max Charge Current=500mA, Max Input Voltage=6V, Max Operating Temperature=85°C, Max Output Voltage=4.5V, Max Power Dissipation=1.54W, Min Operating Temperature=-40°C, Min Output Voltage=4.168V, Min Supply Voltage=3.75V, Output Current=10mA, Output Voltage=4.2V, Package Quantity=3000, Contact Plating=Tin, Height=1.3mm, Lead Free="Lead Free", Length=3.1mm, Max Output Current=500mA, Max Supply Voltage=6V, Mount="Surface Mount", Number of Cells=1, Number of Channels=1, Number of Outputs=1, Number of Pins=5, Packaging="Tape and Reel", Power Dissipation=1.54W, Radiation Hardening=No, REACH SVHC="No SVHC", Termination=SMD/SMT, Width=1.8mm
U6: "Single-cell Li-ion/Li-polymer rechargeable battery pack protection chip w2.90V cutorff", LCSC PartNumber=C154942, Manufacturer=XySemi, PartNumber=XB5307H
U15: library part CMP-2000-07570-1, "USBXpress(TM) Family, 4 GPIOs, 2.2 to 3.6 V, -40 to 85 degC, 24-Pin QFN, RoHS", Case\/Package=QFN, Manufacturer="Silicon Labs", Max Operating Temperature=85degC, Max Supply Voltage=3.6V, Min Operating Temperature=-40degC, Min Supply Voltage=3V, Package Description="24-Pin Quad Flat No-lead Package, Body 4 x 4 mm, Pitch 0.5 mm", Package Reference=QFN-24-2550x2550TP_A, Datasheet URL=http://www.silabs.com/documents/public/data-sheets/cp2102n-datasheet.pdf, Datasheet Version="Rev. 1.1, 08/2016", Manufacturer URL=http://www.silabs.com/, Mounting Technology=SurfaceMount, Number of Pins=24, REACH SVHC=Unknown, RoHSCompliant=False

## Free pads (board coordinates)
  round 0 hole 2 unplated: 2(47,2.5) 2(47,5.04) 2(47,8.5) 2(47,11.04) 2(47,14.46) 2(47,17) 2(47,19.54) 2(47,22.08)

## Via types
v1: diameter 0.6, hole 0.3, Top Layer to Bottom Layer, 136 vias
v2: diameter 0.5, hole 0.2, Top Layer to Bottom Layer, 4 vias

## Nets (pads, with @x,y where several pads share a name; then routed paths per layer and width w, separated by ;. In a path a pad name is that pad's centre, name@x,y a point inside that pad or via, vN(x,y) a via of type N, cw(c..) or ccw(c..) an arc to the next point about the centre after c; other vN are vias at no path point)
3.3V: C2.1 C9.2 C17.1 L2.2 P3.2 R11.1 R13.1 R15.1 U1.2 U3.4 | length 68
  Top Layer w0.2: 10.27,5 10.3,5 10.975,4.325 10.975,4.3 ; U1.2@10.27,6.845 v1(10.3,6.875) ; R13.1@11.5,2.4 11.15,2.4 10.975,2.575 10.975,3.3 ; R15.1 10.975,3.3 ; R11.1 10.975,4.3 ; L2.2@31.275,22.725 31.3,22.75 31.3,23.883 31.417,24 33.5,24 34.55,22.95 U3.4 ; 10.975,3.3 10.975,4.3
  Top Layer w0.6: C17.1@10.27,3.9 10.27,5 U1.2 U1.2@10.27,6.845
  Layer 2 w1: v1(10.3,6.875) 10.3,11.7 11.474,12.874 11.474,23.088 12.386,24 24,24 25.692,22.308 v1(30.167,22.308) 30.175,22.3 30.158,22.283 30.158,21.358 v1(30.15,21.35) 35.528,21.35 37.676,19.202 42.298,19.202 P3.2
3.3V_USB: C4.2 C5.1 R3.2 U15.5 U15.6 | length 15.8
  Top Layer w0.2: R3.2@36.5,13.9 36.522,13.878 37.319,13.878 v1(37.34,13.857)
  Top Layer w0.254: U15.5@33,9.95 33,9.4 33.225,9.175 33.513,9.175 ; U15.6@33.5,9.95 33.5,9.188 33.513,9.175 ; v1(33.85,9.175) 33.513,9.175 ; C5.1@35.1,8.825 35,8.925 35,9.851 35.149,10 C4.2
  Top Layer w0.6: v1(33.85,9.175) 34.126,8.899 34.9,8.899 C5.1@34.9,8.85
  Layer 2 w0.254: v1(33.85,9.175) 33.798,9.227 33.798,14.568 34.282,15.052 34.99,15.052 36.185,13.857 v1(37.34,13.857)
5V: C6.1 C7.2 C8.1 C11.2 P3.1 R1.2 U2.4 U2.7 U2.8 U4.5 U4.8 | length 27.1
  Top Layer w0.2: v1(37.75,9.475) R1.2 ; v1(38.7,9.675) 38.7,9.783 38.875,9.958 U2.4
  Top Layer w0.254: U4.5@38.773,19.202 38.715,19.202 38.4,18.887 38.4,18.037 38.862,17.575 40.304,17.575 40.654,17.925 41.3,17.925 ; U2.7 40.55,9.135 40.718,8.968 ; v1(40.718,8.45) 40.718,8.968 ; U2.8 41.027,9.577 41.027,9.277 40.718,8.968
  Top Layer w0.6: C6.1@40.175,8.45 v1(40.718,8.45) C7.2 ; 41.3,18.1 C8.1
  Top Layer w1: C8.1 42.8,17.35 42.8,14.4 ; v1(42.827,12.851) 42.8,12.878 42.8,14.4 ; P3.1 44.44,14.4 42.8,14.4
  Layer 2 w1: v1(37.75,9.475) 37.95,9.675 v1(38.7,9.675) 39.925,8.45 v1(40.718,8.45) 41.8,9.533 41.8,11.914 42.736,12.851 v1(42.827,12.851)
5V_EN: R25.2 TP7.1 U1.33 U4.6 | length 38.1
  Top Layer w0.2: v1(29,17.025) 29,17.133 28.8,17.333 28.8,19.292 29,19.492 v1(29,19.6) ; R25.2 39.586,16.5 v1@39.887,16.801 ; v1(39.121,18.202) 39.05,18.273 39.05,18.634 39.275,18.859 U4.6 ; v1(39.946,16.925) 40.925,16.925 TP7.1
  Layer 2 w0.2: v1(15.3,23) 17.051,23 23.026,17.025 v1(29,17.025) ; v1(29,19.6) 29.6,19.6 30.475,18.725 36.016,18.725 36.539,18.202 37.45,18.202 ; v1(39.121,18.202) 37.45,18.202 ; v1(39.946,16.925) 39.903,16.925 39.603,16.626 38.053,16.626 37.575,17.104 37.575,18.077 37.45,18.202
5V_USB: C3.2 C12.1 D1.2 J1.VBUS Q3.1 R4.2 R6.2 R22.1 U5.4 U15.7 | length 32.8
  Top Layer w0.2: R4.2 30.375,5.575 30.375,5.192 30.492,5.075 30.658,5.075 30.871,5.288 30.871,6.047 30.875,6.051 30.875,7.011 30.992,7.128 31.478,7.128 ; R22.1 31.425,7.075 31.478,7.128 ; v1(33.432,7.128) 31.478,7.128 ; C3.2 35.866,11.156 35.866,11.56 37.06,11.56 37.2,11.7 37.2,11.983 37.083,12.1 R6.2
  Top Layer w0.254: U15.7@34.3,10.75 34.323,10.727 34.936,10.727 v1(35,10.663) ; v1@34.975,10.75 35.144,10.75 35.261,10.867 C3.2@35.577,10.867
  Top Layer w0.4: J1.VBUS 26.7,4.448 26.873,4.621 v1(26.873,4.675)
  Top Layer w0.6: D1.2 33.077,8.053 33.077,7.483 v1(33.432,7.128) 34.76,7.128 Q3.1 ; v1(36.581,4.581) 36.581,3.95 36.681,3.85 C12.1 ; C12.1@36.693,3.85 36.779,3.764 37.336,3.764 U5.4@37.965,3.136
  Layer 2 w0.6: v1(33.432,7.128) 35,8.696 v1(35,10.663)
  Layer 2 w1: v1(26.873,4.675) 26.873,4.747 28.226,6.1 33.432,6.1 ; v1(33.432,7.128) 33.432,6.1 ; v1(36.581,4.581) 34.951,4.581 33.432,6.1
AMP_BCLK: TP4.1 U1.11 U2.16 | length 27.4
  Top Layer w0.2: TP4.1 39.025,14.975 39.025,14.097 39.057,14.065 v1(39.057,13.975)
  Top Layer w0.206: U1.11 21.728,6.028 21.7,6.056 v1(21.7,7) ; v1(39.057,13.975) 39.057,13.243 39.503,12.797 U2.16@39.503,12.54
  Layer 2 w0.206: v1(21.7,7) 22.606,7.906 22.606,11.032 26.543,14.969 30.62,14.969 31.539,15.888 35.336,15.888 36.354,14.869 38.157,14.869 39.051,13.975 v1(39.057,13.975)
AMP_DIN: TP3.1 U1.12 U2.1 | length 26.6
  Top Layer w0.2: TP3.1 37.046,15 v1@38.08,13.966
  Top Layer w0.206: U1.12 v1(22.97,6.97) ; v1(38.197,13.966) 38.184,13.953 38.184,13.503 38.875,12.813 U2.1@38.875,11.778
  Layer 2 w0.206: v1(22.97,6.97) 23.011,7.011 23.011,10.864 26.711,14.564 30.789,14.564 31.707,15.482 35.168,15.482 36.19,14.46 37.703,14.46 v1(38.197,13.966)
AMP_LRCLK: TP5.1 U1.10 U2.14 | length 30.1
  Top Layer w0.206: U1.10 20.5,6.07 v1(20.5,7) ; U2.14 40.55,14.482 41,14.932 v1(41,15)
  Layer 2 w0.206: v1(20.5,7) 22.2,8.7 22.2,11.2 26.375,15.375 30.452,15.375 31.371,16.293 35.504,16.293 36.522,15.275 38.325,15.275 38.6,15 v1(41,15)
BAT_SENSE: R19.1 R21.1 TP2.1 U1.7 | length 23
  Top Layer w0.2: v1(33.95,1.925) 33.95,1.45 R21.1 33.891,1.209 34.183,1.209 34.3,1.091 34.3,0.874 34.325,0.849 34.325,0.709 34.442,0.591 34.734,0.591 R19.1
  Layer 2 w0.2: v1(16.9,7) 16.907,7 19.9,4.007 19.9,3.046 21.285,1.661 ; v1(21,1) 21,1.108 21.285,1.393 21.285,1.661 ; v1@33.877,1.89 33.767,2 24.002,2 23.664,1.661 21.285,1.661
BAT_SENSE_EN: Q2.2 R20.2 U1.8 | length 20.2
  Top Layer w0.2: v1(32.427,2.8) 32.5,2.8 32.8,3.1 Q2.2 ; v1@32.5,2.798 32.5,1.7 R20.2
  Layer 2 w0.2: v1(17.9,7) 17.91,6.99 17.91,6.562 20.3,4.172 20.3,3.212 21.343,2.169 23.606,2.169 23.837,2.4 31.978,2.4 32.378,2.8 v1(32.427,2.8)
CHARGE_STAT: U1.9 U5.1 | length 27.8
  Top Layer w0.2: v1(39.502,1.196) 39.517,1.211 40.552,1.211 U5.1@40.566,1.225
  Layer 2 w0.2: v1(19.2,7) 19.2,5.869 20.7,4.369 20.7,3.378 21.508,2.569 23.372,2.569 25.202,4.4 25.948,4.4 26.473,3.875 27.4,3.875 28.725,5.2 31.9,5.2 33.275,3.825 33.275,3.525 35.604,1.196 v1(39.502,1.196)
D\T\R\: Q1.4 R16.1 TP19.1 U15.23 | length 25.6
  Top Layer w0.2: v1(15.423,1.917) 15.423,2.019 15.55,2.146 15.55,2.45 15.6,2.5 Q1.4 ; R16.1@17.95,3.5 17.959,3.509 18.242,3.509 18.601,3.15 v1@18.601,3.075
  Top Layer w0.206: v1(18.5,3.075) 18.601,3.075 21.301,3.075 v1(21.651,3.425) ; v1(28.826,10.676) 28.876,10.726 29.226,10.726 29.747,11.247 30.197,11.247 U15.23@30.2,11.25
  Layer 2 w0.2: v1(12.99,1) 14.506,1 v1(15.423,1.917)
  Layer 2 w0.206: v1(15.423,1.917) 16.582,3.075 v1(18.5,3.075) ; v1(21.651,3.425) 21.726,3.425 22.179,2.972 23.205,2.972 24.272,4.04 24.272,5.372 25.156,6.256 25.156,8.656 27.176,10.676 v1(28.826,10.676)
ESP32_EN: C13.1 Q1.6 R15.2 TP13.1 U1.3 | length 15.9
  Top Layer w0.2: v1(9,1) 9.6,1.6 10.1,1.6 10.25,1.75 C13.1 ; U1.3 11.54,4.949 11.657,4.832 13.117,4.832 13.518,4.431 v1(13.518,3.672) ; R15.2 13.145,3.3 v1(13.518,3.672) ; Q1.6 15.654,3.5 15.604,3.55 15.604,3.829 15.483,3.95 13.8,3.95 13.522,3.672 v1(13.518,3.672)
  Layer 2 w0.2: v1(9,1) 9.8,1.8 11.649,1.8 13.518,3.669 v1(13.518,3.672)
GAIN: R1.1 R2.2 U2.2 | length 1.9
  Top Layer w0.2: R1.1 37.75,11.225 ; R2.2 37.75,11.225 ; U2.2 38.825,11.275 38.275,11.275 38.225,11.225 37.75,11.225
GND: C1.2 C2.2 C3.1 C4.1 C5.2 C6.2 C7.1 C8.2 C9.1 C10.2 C11.1 C12.2 C13.2 C14.2 C16.2 C17.2 J1.GND J1.S1 J1.S2 J1.S3 J1.S4 J1.S5 J1.S6 P3.4 Q2.1 R2.1 R5.2 R7.1 R20.1 R21.2 R22.2 R25.1 R26.1 SW1.2 SW2.2 SW3.2 SW4.2 U1.1 U1.15 U1.38 U1.39 U2.3 U2.11 U2.15 U2.17 U3.2 U4.2 U4.4 U4.9 U5.2 U6.2 U15.2 U15.25 | length 34.9
  Top Layer w0.2: v1(8,3) 8.419,2.581 8.869,2.581 C13.2 ; v1(29.301,4.525) 29.351,4.575 29.351,5.551 R5.2 ; J1.S1 31.9,0.625 32.775,0.625 R20.1 R21.2@33.725,0.5 ; Q2.1 33.3,3.7 v1(33.95,3.7) ; R21.2 R21.2@33.875,0.5 ; v1(36.25,16.4) 36.346,16.496 36.846,16.496 R25.1 ; C3.1 36.908,11 37.025,10.883 v1(37.025,10.475) ; R7.1 37.392,13 37.492,13.1 v1(37.6,13.1) 37.6,12.992 37.775,12.817 37.775,12.4 R2.1 ; C12.2 36.8,2.45 36.85,2.4 R26.1 ; U2.3 40.05,10.825 U2.17 ; v1(39.818,13.394) 39.818,13.324 40.05,13.092 U2.15
  Top Layer w0.254: J1.S2 J1.S6 ; J1.S5 J1.S1 ; v1(31,8.996) 31.003,8.996 31.5,9.493 U15.2@31.5,9.95 ; v1(31.425,4.6) R22.2@31.425,5.55 ; C4.1 37.025,10 ; 37.025,8.875 37.025,10 ; v1(37.025,10.475) 37.025,10 ; U2.11 41.734,11.334 42.449,11.334 42.915,11.8 v1(43.1,11.8) ; C7.1 v1(42.85,8.45)
  Top Layer w0.4: J1.GND v1@29.3,4.624 ; v1(29.301,4.525) v1@29.301,4.625
  Top Layer w0.6: C17.2@8.975,3.9 8.975,5.975 U1.1 ; C5.2 36.375,8.875 37.025,8.875 37.425,8.475 v1(37.75,8.475) 38.5,8.475 C6.2 ; C12.2@36.8,2.45 36.95,2.45 37.3,2.1 v1(37.7,2.1) v1(39.4,2.1) 39.5,2.2 39.514,2.186 40.555,2.186 U5.2@40.577,2.164 ; U6.2 v1(39.4,6.2) ; U5.2@40.6,2.175 U5.2 41.774,2.175 42.099,1.85 42.275,1.85 C14.2@42.3,1.825
  other v1: 22.927,0.8 8,1 10,1 12,1 18,1 27,1 29,1 45,1 8,2 8,4 8,5 8,6 8.875,6.85 8,7 8,8 28,8.9 8,9 8,10 8,11 40.35,11.075 8,12 28.35,13.961 17.7,14.9 8,15 8,16 30.15,16.05 30.175,16.975 8,17 8,18 8,19 32.225,19.475 33.35,19.5 8,20 38.525,20.35 40.475,20.375 42.375,20.875 8,21 8,22 8,23 8,24 9,24 28,24 30,24 35,24 37,24 39,24 41,24 43,24 45,24
  other v2: 31.7,11.45 32.8,11.45 31.7,12.55 32.8,12.55
IO0: Q1.3 R13.2 SW2.1 TP6.1 U1.25 | length 42.1
  Top Layer w0.2: TP6.1 11.675,1.675 12.564,1.675 12.889,2 ; R13.2 12.739,2.3 12.889,2.15 12.889,2 ; v1(13.5,2) 12.889,2 ; v1@13.6,2 14.05,2.45 14.275,2.45 Q1.3 ; v1(16.649,4.25) v1(21.425,4.25) ; U1.25 26.26,24 28.4,21.86 v1(28.4,16.2)
  Layer 2 w0.2: v1(13.5,2) 14.399,2 v1(16.649,4.25) ; v1(21.425,4.25) 21.401,4.25 19.9,5.751 19.9,12.9 20.363,13.363 v1(20.363,13.437) 23.125,16.2 v1(28.4,16.2)
IO16: SW4.1 U1.27 | length 24.8
  Top Layer w0.2: v1(22.9,23) 22.9,23.93 U1.27
  Layer 2 w0.2: v1(22.9,23) 26.975,18.925 29.625,18.925 30.225,18.325 35.775,18.325 37.95,16.15 39.724,16.15 39.899,16.325 41.725,16.325 v1(41.8,16.4)
  Bottom Layer w0.2: SW4.1 41.8,17.875 v1(41.8,16.4)
IO17: SW3.1 U1.28 | length 11.8
  Top Layer w0.2: v1(21.7,23) U1.28
  Layer 2 w0.2: v1(21.7,23) 26.4,18.3 v1(29.4,18.3)
  Bottom Layer w0.6: v1(29.4,18.3) 30.375,18.3 SW3.1
IO34: R11.2 SW1.1 U1.6 | length 17.7
  Top Layer w0.2: R11.2 12.35,4.25 12.85,4.25 v1(12.9,4.2)
  Layer 2 w0.2: v1(10.1,13.4) 9.5,12.8 9.5,6.5 10,6 11.1,6 v1(12.9,4.2) 15.275,6.575 v1(15.275,7)
  Bottom Layer w0.2: SW1.1 8.825,13.825 9.3,13.35 9.35,13.4 v1(10.1,13.4)
MIDI_IN: P3.3 U1.31 | length 35.4
  Top Layer w0.2: U1.31 17.9,23.99 v1(17.9,23)
  Layer 2 w0.2: v1(17.9,23) 23.275,17.625 35.874,17.625 37.749,15.75 44.735,15.75 45.55,16.565 45.55,18.49 P3.3
NetC15_1: C15.1 P2.2 U6.3 U6.6 | length 8.7
  Top Layer w0.6: U6.3 39.849,5.25 40.2,5.601 40.2,6.799 40.551,7.15 U6.6 42.6,7.15 C15.1@42.6,7.12 ; C15.1@42.6,7.14 43.017,7.14 44.232,5.925 44.232,5.308 P2.2
NetC15_2: C15.2 R27.1 U6.5 | length 2.6
  Top Layer w0.2: U6.5 42.54,6.2 42.6,6.26 R27.1
NetL2_1: L2.1 U3.5
NetL3_2: L3.2 U4.1
NetQ1_2: Q1.2 R16.2 | length 6.3
  Top Layer w0.2: v1(13.5,2.8) 13.58,2.8 13.817,3.038 14.288,3.038 Q1.2 ; v1(14.124,4.576) 14.25,4.45 15.6,4.45 16.55,3.5 R16.2@17.05,3.5
  Layer 2 w0.2: v1(13.5,2.8) 14.124,3.424 v1(14.124,4.576)
NetQ1_5: Q1.5 R14.2 | length 1.6
  Top Layer w0.206: Q1.5 16.1,3 16.6,2.5 R14.2@17.05,2.5
NetQ2_3: Q2.3 R19.2 | length 2.5
  Top Layer w0.2: Q2.3 33.39,2.59 34.134,2.59 34.55,2.174 34.55,2.116 34.825,1.841 R19.2
NetQ2_5: Q2.5 Q2.6 R18.1 | length 3.8
  Top Layer w0.2: Q2.5 35.8,3.1 35.85,3.05 ; Q2.6 35.675,3.75 35.85,3.575 35.85,3.05 ; R18.1 35.9,1.85 35.85,1.9 35.85,3.05
NetR8_1: R8.1 U4.7 | length 3.9
  Top Layer w0.2: R8.1@37.775,17.375 R8.1 37.975,17.5 38.249,17.226 v1(38.302,17.226) ; U4.7 39.777,19.248 39.777,18.754 39.977,18.554 39.977,18.525
  Layer 2 w0.2: v1(38.302,17.226) 38.355,17.226 38.375,17.246 39.221,17.246 39.9,17.925 39.9,18.125 v1(39.977,18.202)
NetR26_2: R26.2 U5.5 | length 1.8
  Top Layer w0.2: R26.2 37.375,0.5 37.881,1.006 37.881,1.05 38.056,1.225 U5.5@38.334,1.225
R\T\S\: Q1.1 R14.1 TP16.1 U15.19 | length 26.7
  Top Layer w0.2: R14.1@17.95,2.5 17.975,2.475 18.498,2.475 18.696,2.278
  Top Layer w0.206: Q1.1 14.7,3.5 14.853,3.347 14.853,2.147 14.775,2.069 14.775,1.44 15,1.215 TP16.1 15.8,1 16.695,1.895 18.312,1.895 18.696,2.278 18.746,2.328 18.991,2.328 19.277,2.614 21.693,2.614 22.254,3.175 22.254,4.071 v1(22.225,4.1) ; v1(28.826,13.238) 30.188,13.238 U15.19@30.2,13.25
  Layer 2 w0.206: v1(22.225,4.1) 22.225,5.073 23.939,6.786 23.939,9.16 28.016,13.238 v1(28.826,13.238)
SPEAKER_N: P1.2 U2.10 | length 2.9
  Top Layer w0.254: U2.10 42.85,10.825
  Top Layer w0.6: 42.85,10.825 42.95,10.825 42.993,10.868 44.114,10.868 44.287,11.04 P1.2
SPEAKER_P: P1.1 U2.9 | length 3.5
  Top Layer w0.254: U2.9 41.748,10.302 42.298,10.302 42.625,9.975
  Top Layer w0.6: 42.625,9.975 43.025,9.975 P1.1
UART0_RXD: TP18.1 U1.34 U15.21 | length 45.5
  Top Layer w0.2: U1.34 14.072,23.992 14.1,23.965 v1(14.1,23)
  Top Layer w0.206: v1(19,1) 19.865,1 20.667,1.803 22.081,1.803 23.607,3.329 23.607,4.221 v1(23.604,4.224) ; v1(29,11.5) 29.747,12.247 30.197,12.247 U15.21@30.2,12.25
  Layer 2 w0.2: v1(14.1,23) 16.275,20.825 16.275,6.325 17.1,5.5 17.841,5.5 19.5,3.841 19.5,2.879 20.301,2.078 20.301,1.477 19.824,1 v1(19,1)
  Layer 2 w0.206: v1(23.604,4.224) 23.604,4.253 23.669,4.318 23.669,5.369 24.75,6.45 24.75,8.824 27.426,11.5 v1(29,11.5)
UART0_TXD: TP17.1 U1.35 U15.20 | length 45.2
  Top Layer w0.206: v1(19.701,1.725) 20.184,2.209 21.861,2.209 23.001,3.349 23.001,3.575 v1(22.978,3.598) ; v1(29,12.438) 29.107,12.438 29.419,12.75 U15.20@30.2,12.75
  Layer 2 w0.2: v1(12.8,23) 15.875,19.925 15.875,6.125 16.9,5.1 17.675,5.1 19.1,3.675 19.1,2.416 19.701,1.815 v1(19.701,1.725) 17.725,1.725 v1(17,1)
  Layer 2 w0.206: v1(22.978,3.598) 23.001,3.621 23.001,5.275 24.344,6.618 24.344,8.992 27.79,12.438 v1(29,12.438)
"USB D_N": J1.D- U15.4 | length 9.9
  Top Layer w0.205: J1.D- ccw(c27.115,3.735) 27.447,3.735 27.447,4.032 cw(c27.552,4.032) 27.478,4.106 ccw(c27.404,4.18) 27.509,4.18 27.509,5.386 cw(c29.323,5.386) 28.04,6.669 29.308,7.937 cw(c30.299,6.945) 30.299,8.347 32,8.347 ccw(c32,8.95) 32.426,8.523 ; 32.426,8.524 32.452,8.55 ccw(c32.088,8.913) 32.603,8.913 32.603,9.073 ccw(c32.423,9.073) 32.55,9.2 cw(c32.671,9.321) 32.5,9.321 U15.4@32.5,9.95
"USB D_P": J1.D+ U15.3 | length 9.9
  Top Layer w0.205: J1.D+ cw(c28.235,3.735) 27.903,3.735 27.903,4.032 ccw(c27.798,4.032) 27.872,4.106 cw(c27.946,4.18) 27.841,4.18 27.841,5.383 cw(c29.331,5.383) 28.278,6.436 29.446,7.604 cw(c30.437,6.613) 30.437,8.015 31.6,8.015 cw(c31.6,7.364) 32.06,7.825 32.14,7.745 v1(32.187,7.745) ; v1(32,8.95) U15.3@32,9.95
  Layer 2 w0.205: v1(32,8.95) 32,8.196 ccw(c32.639,8.196) 32,8.175 ccw(c32.639,8.196) v1(32.187,7.745)
"USB VBUS": R6.1 R7.2 U15.8 | length 3.3
  Top Layer w0.2: U15.8 34.874,11.25 35.325,11.701 35.325,12.1 ; R6.1 35.325,12.1 ; R7.2 35.4,13 35.325,12.925 35.325,12.1
USB_RESET: R3.1 U15.9 | length 3.4
  Top Layer w0.2: U15.9 34.808,11.75 34.925,11.867 34.925,13.617 35.158,13.85 R3.1
V_BAT: C14.1 P2.1 Q2.4 Q3.3 R18.2 R27.2 U5.3 | length 19.4
  Top Layer w0.2: R18.2@36.025,0.5 R18.2 35.471,0.5 35.354,0.617 35.354,2.223 35.35,2.227 35.35,2.34 35.24,2.45 Q2.4 35.04,2.56 34.756,2.56 34.55,2.766 34.55,4.125 34.925,4.5 35.575,4.5 36.1,5.025 36.1,5.869 36.129,5.899 36.129,6.003 36.326,6.2 36.446,6.2 Q3.3 ; C14.1@42.6,3.05 42.6,3.1 R27.2
  Top Layer w0.6: Q3.3 37.09,6.2 37.102,6.188 37.102,5.191 37.993,4.3 39.033,4.3 40.208,3.125 40.566,3.125 U5.3@40.577,3.114 ; U5.3@40.6,3.125 U5.3 42.325,3.125 C14.1 42.45,3.1 42.6,3.1 43.9,3.1 P2.1
V_SWITCH: C1.1 C10.1 C16.1 D1.1 L3.1 Q3.2 R8.2 TP1.1 U3.1 U3.3 U4.3 | length 28.9
  Top Layer w0.2: U3.3 35.353,18.175 ; 35.55,17.5 R8.2
  Top Layer w0.6: C16.1 C1.1 32.65,16.85 U3.1 ; D1.1 33.05,4.753 33.582,5.285 Q3.2 35.282,5.285 35.294,5.297 35.294,6.194 v1(35.325,6.225) ; v1(34.625,14.225) 34.684,14.225 34.923,14.464 TP1.1@34.923,14.923
  Top Layer w1: C1.1 35,16.7 ; TP1.1@34.923,14.923 TP1.1 35,16.7 ; C10.1 36.897,21.525 35.55,20.178 35.55,18.175 35.55,17.25 35,16.7
  Layer 2 w1: v1(34.625,14.225) 36,12.85 36,6.9 v1(35.325,6.225)
WALL_SENSE: R4.1 R5.1 U1.5 | length 21.3
  Top Layer w0.2: U1.5 14.43,5.65 14.43,5.118 14.698,4.85 26.2,4.85 26.75,5.4 26.75,6.35 v1(28.725,8.325) ; R5.1 29.4,6.9 29.675,7.175 v1(29.9,7.175) 30.175,7.175 30.35,7 R4.1
  Layer 2 w0.2: v1(28.725,8.325) 29.875,7.175 v1(29.9,7.175)
pads on no net: J1.ID U1.4 U1.13 U1.14 U1.16 U1.17 U1.18 U1.19 U1.20 U1.21 U1.22 U1.23 U1.24 U1.26 U1.29 U1.30 U1.32 U1.36 U1.37 U2.5 U2.6 U2.12 U2.13 U6.1 U6.4 U15.1 U15.10 U15.11 U15.12 U15.13 U15.14 U15.15 U15.16 U15.17 U15.18 U15.22 U15.24
copper on no net: | length 0.1
  Top Layer w0.2: 24.24,24 24.3,24

## Polygon pours and split planes (outlines as drawn)
5V on Top Layer "5V_L01_P010" (solid, remove dead copper, pour order 10): 42.75,19.4 40.7,19.4 40.575,19.525 40.075,19.525 40.075,18.95 40.487,18.574 40.487,17.55 42.75,17.525
GND on Top Layer "GND_L01_P008" (solid, pour order 8): 29.4,20.05 33.6,20.05 34.025,19.625 34.025,17.55 33.225,17.55 33.225,18.875 31.6,18.875 31.6,14.8 29.4,14.8
NetL3_2 on Top Layer "NETL3_2_L01_P003" (solid, pour order 3): 40.025,20.875 40.025,21.3 39.9,21.425 39.9,23.5 41.3,23.5 41.3,20.875
GND on Top Layer "GND_L01_P013" (solid, remove dead copper, pour order 13): 38.5,21.3 39.025,21.3 39.55,21.3 40,21.3 42.8,21.3 42.8,19.6 37.25,19.6 37.25,20.75 38.5,20.75
no net on Top Layer "NONET_L01_P012" (solid, pour order 12): 39.1,21.425
no net on Top Layer "NONET_L01_P011" (solid, pour order 11): 38.425,21.375
V_SWITCH on Top Layer "V_SWITCH_L01_P004" (solid, pour order 4): 38.525,21.05 37.075,21.05 37.075,22.575 38,23.5 39.5,23.5 39.5,20.875 39.025,20.875 39.025,21.375 38.525,21.375
NetL2_1 on Top Layer "NETL2_1_L01_P009" (solid, pour order 9): 32,20.225 33.575,20.225 33.575,23.8 32,23.8
3.3V on Top Layer "3.3V_L01_P007" (solid, pour order 7): 31.825,20.225 31.825,23.8 30.575,23.8 29.4,22.625 29.4,20.225
no net on Top Layer "NONET_L01_P005" (solid, pour order 5): 40.4,21.175
GND on Layer 2 "NONET_L01_P-001" (solid, pour order 15): 33,6.6 33,9.95 33.05,9.95 33.6,10.5 33.6,13.5 30,13.5 30,7.7 31.1,6.6
GND on Layer 2 "NONET_L01_P-001" (solid, pour order 14): 7.6,0 7.6,25 9.4,25 9.4,0
GND on Layer 1 "NONET_L02_P-001" (solid, pour order 0): 7.6,25 7.6,0 45.7,0 45.7,25
GND on Bottom Layer "NONET_L02_P-001" (solid, pour order 2): 7.6,25 7.6,0 31,0 45.7,0 45.7,25

## Silkscreen, mask and mechanical layers (free items; w line width, h text height)
Bottom Overlay:
  text "GND" at 48.55,20.8 h1.6 r270
  text "MIDI" at 48.55,17.95 h1.6 r270
  text "3V3" at 48.55,15.051 h1.6 r270
  text "MIDI" at 16.3,14.434 h1.6 r270
  text "EXTRA" at 38.3,13.058 h1.6 r270
  text "5V" at 48.55,12.927 h1.6 r270
  text "POWER" at 5.3,12.673 h1.6 r270
  text "CONFIG" at 27.3,12.676 h1.6 r270
  text "SPK-" at 48.55,9.6 h1.6 r270
  text "SPK+" at 48.55,6.281 h1.6 r270
  text "B-" at 48.55,3.507 h1.6 r270
  text "https://github.com/bwhitman/alles" at 0.253,1 h1.6 r270
  text "'.VersionRevision' 2021-11-19" at 2.23,1 h1.6 r270
  text "B+" at 48.55,0.967 h1.6 r270
  text "'.Project'" at 3.464,0.9 h6 r270
Top Paste:
  region: 25.575,2.8 ccw(c25.575,2.95) 25.575,3.1 cw(c25.575,3.5) 25.175,3.5 cw(c25.575,3.5) 25.575,3.9 ccw(c25.575,4.05) 25.575,4.2 ccw(c25.575,3.5) 24.875,3.5 ccw(c25.575,3.5)
  region: 30.433,4.192 ccw(c30.433,4.055) 30.433,3.917 cw(c30.433,3.492) 30.858,3.492 cw(c30.433,3.492) 30.433,3.067 ccw(c30.433,2.93) 30.433,2.792 ccw(c30.433,3.492) 31.133,3.492 ccw(c30.433,3.492)
  region: 24.375,0.025 cw(c24.375,0.7) 23.7,0.7 23.7,1.075 cw(c24.387,1.088) 24.375,1.775 cw(c24.375,1.625) 24.375,1.475 ccw(c24.375,1.1) 24,1.1 24,0.7 ccw(c24.362,0.712) 24.375,0.35 cw(c24.375,0.188)
  region: 31.625,1.775 cw(c31.625,1.1) 32.3,1.1 32.3,0.725 cw(c31.613,0.712) 31.625,0.025 cw(c31.625,0.175) 31.625,0.325 ccw(c31.625,0.7) 32,0.7 32,1.1 ccw(c31.638,1.088) 31.625,1.45 cw(c31.625,1.612)
Mechanical 1:
  the board outline again, w0.1
Dimensions:
  lines w0.1: 1.5,0 1.5,25 ; 48.5,0 48.5,25